# Altium PCB led_7seg_big.PcbDoc (part 2 of 2)
Units mm, origin at the board's own origin, x right, y up, seen from the top; angles counter-clockwise.
Board outline 221 x 297 mm, 2 copper layers (Top Layer, Bottom Layer); 205 components, 177 nets, 962 pads, 294 vias.
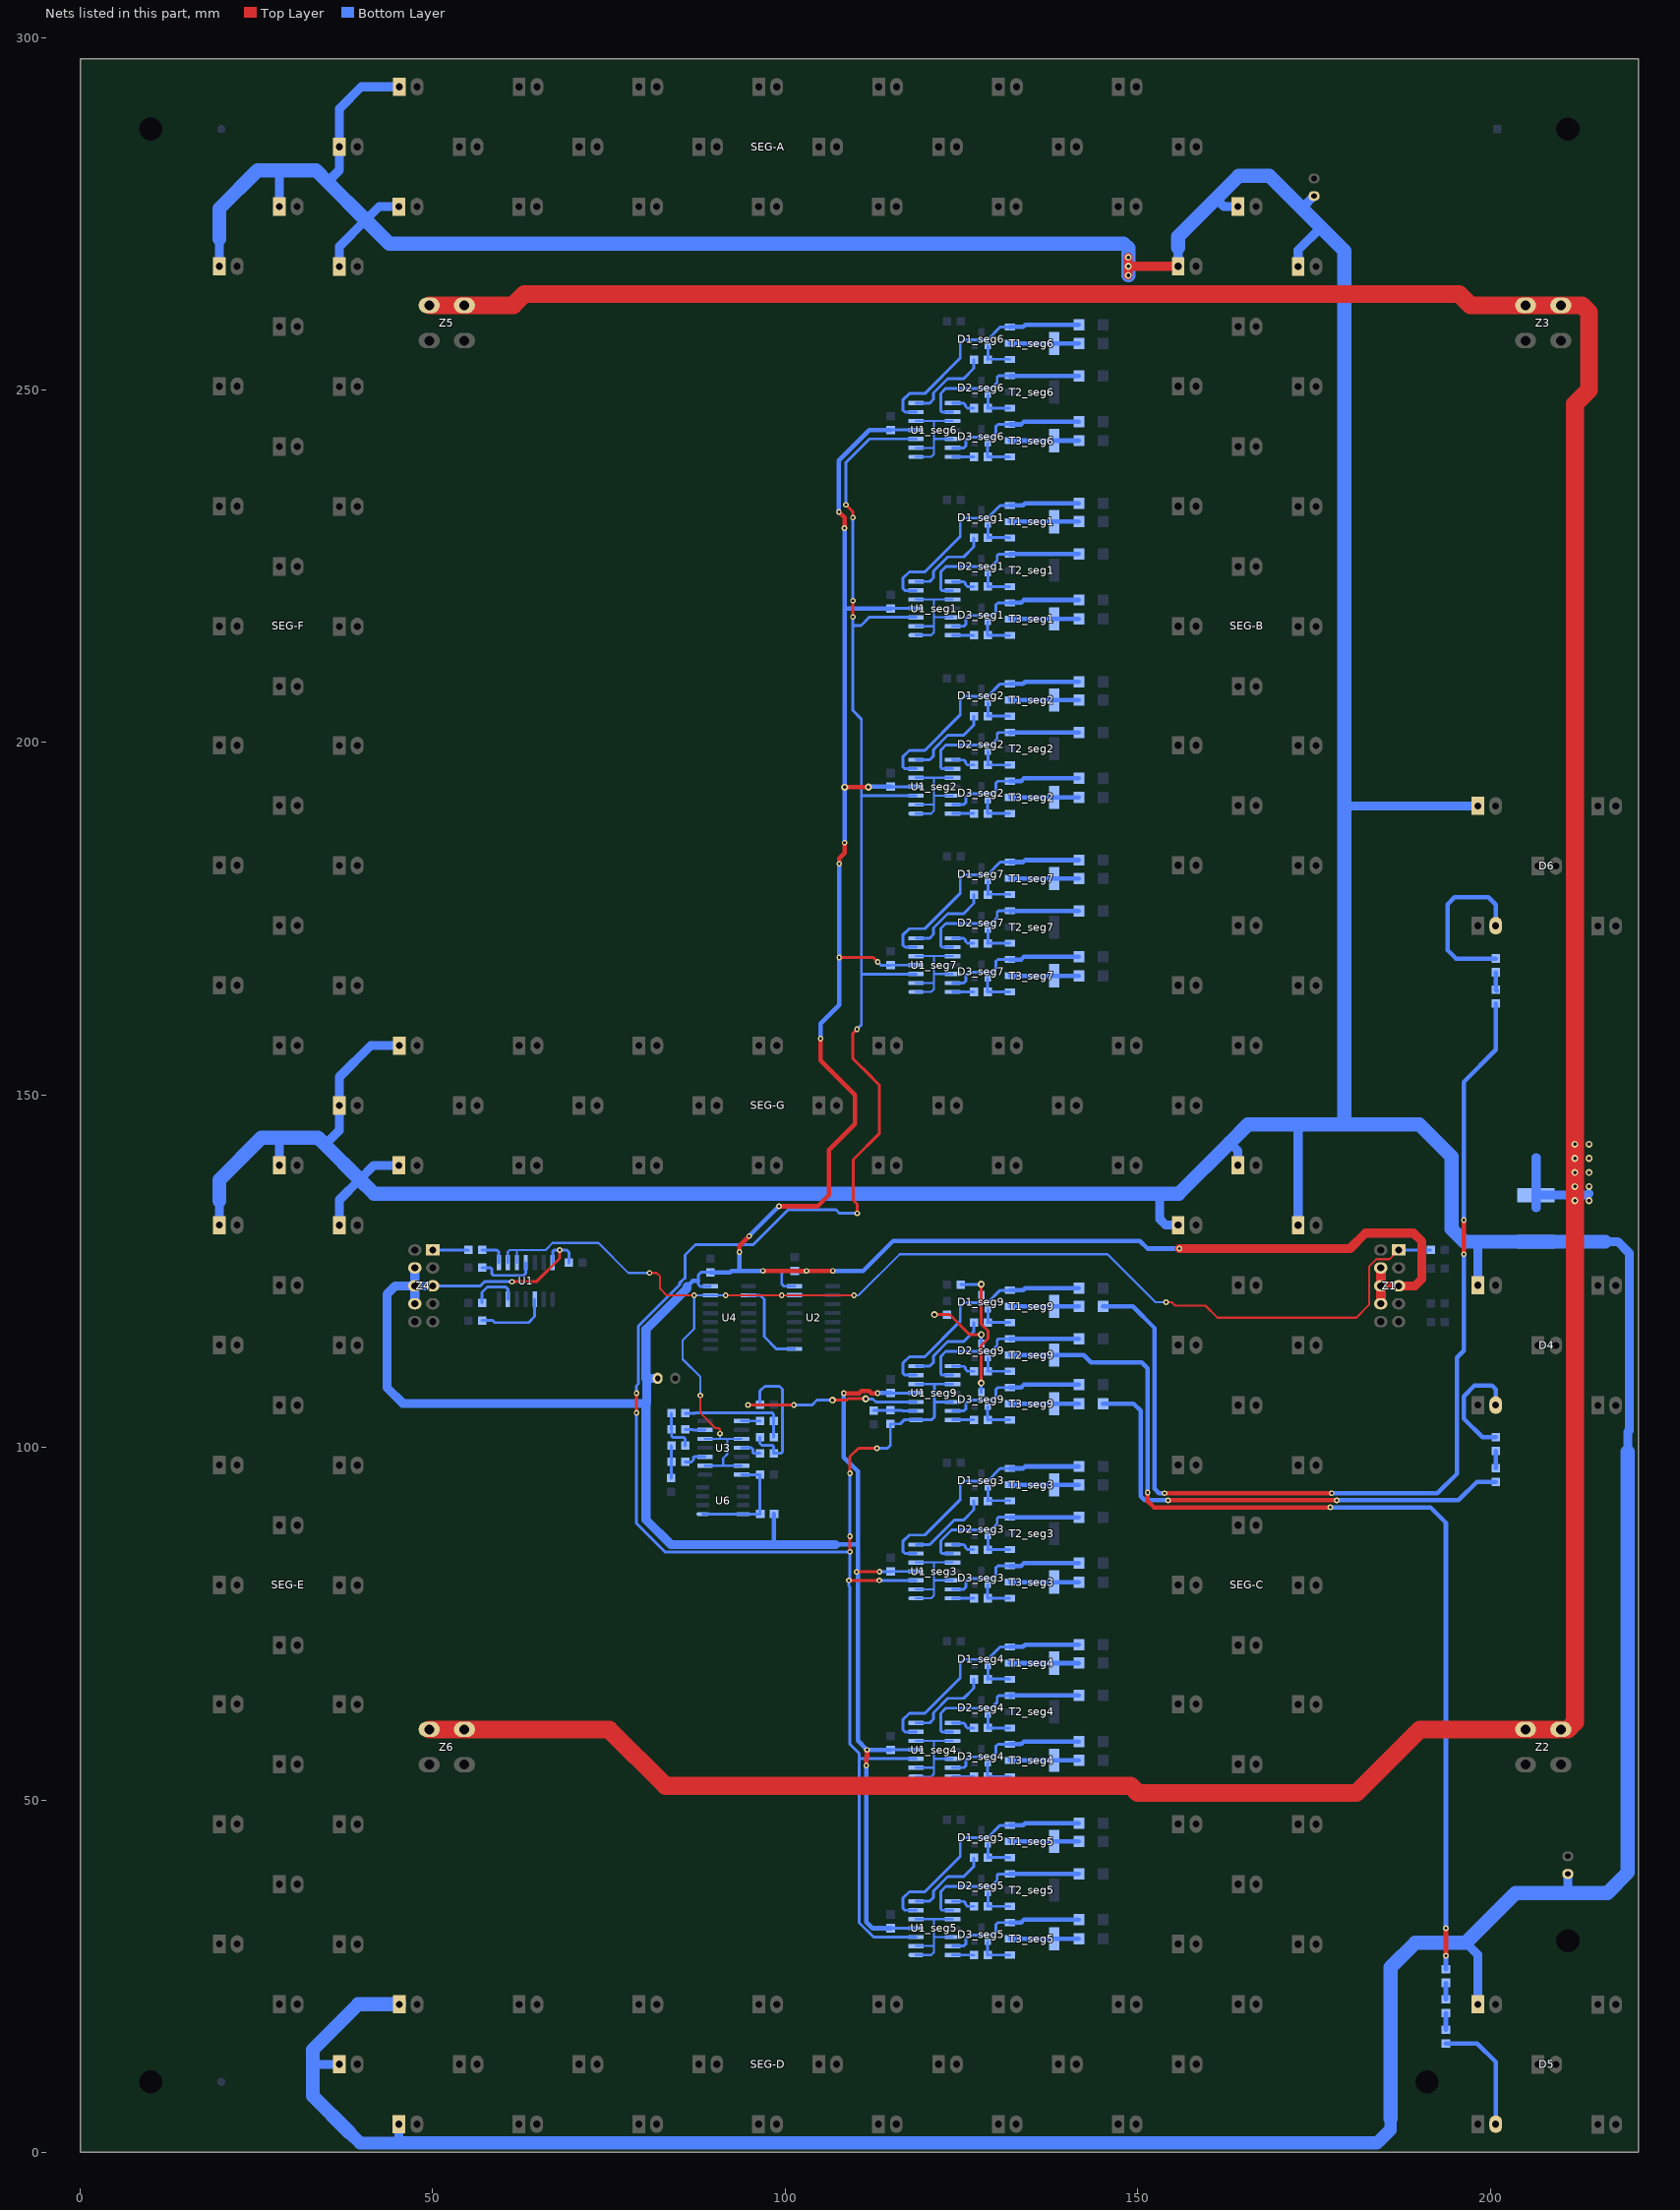
[diagram p2: the nets of this part, all layers, seen from the top]

## Via types
v1: diameter 1, hole 0.5, Top Layer to Bottom Layer, 198 vias
v2: diameter 0.8, hole 0.4, Top Layer to Bottom Layer, 96 vias

## Nets (pads, with @x,y where several pads share a name; then routed paths per layer and width w, separated by ;. In a path a pad name is that pad's centre, name@x,y a point inside that pad or via, vN(x,y) a via of type N, cw(c..) or ccw(c..) an arc to the next point about the centre after c; other vN are vias at no path point) (continued)
MODE: R30.2 U1.9 U1.10 U2.15 U3.2 U3.5 U3.10 U3.13 U4.15 Z1.1 | length 191.9
  Top Layer w0.305: v2(80.75,124.75) 81.75,124.75 82.25,124.25 82.25,122.5 83.166,121.584 v2(87.084,121.584) ; v2(87.968,107.366) 87.968,104.87 90.094,102.743 90.533,102.743 90.736,102.54 v2(90.736,101.956) ; v2(91.549,121.59) v2(99.499,121.59) v2(109.75,121.59) ; v2(154,120.6) 154.8,120.6 155.3,120.1 159.6,120.1 161.3,118.4 181,118.4 182.8,120.2 182.8,125.656 183.844,126.7 185.7,126.7 Z1.1@187,128
  Bottom Layer w0.305: U1.9@60.65,126.2 60.65,127.75 60.9,128 66,128 67,129 73.5,129 77.75,124.75 v2(80.75,124.75) ; U1.10@61.92,126.2 61.92,127.98 ; v2(87.968,107.366) 87.968,109.982 85.453,112.497 85.453,115.203 87.084,116.834 v2(87.084,121.584) U4.15@89.371,121.584 91.543,121.584 v2(91.549,121.59) ; U3.2@88.611,97.402 91.193,97.402 ; U3.5@88.611,101.212 90.736,101.212 ; v2(90.736,101.956) 90.736,101.212 ; U3.13@93.811,97.402 91.193,97.402 ; U3.10@93.811,101.212 91.778,101.212 ; v2(99.499,121.59) U2.15@101.31,121.59 ; v2(109.75,121.59) 110.41,121.59 116.22,127.4 145.7,127.4 152.5,120.6 v2(154,120.6) ; 90.736,101.212 91.778,101.212 ; 91.193,97.402 91.193,98.45 91.778,99.035 91.778,101.212
  Bottom Layer w0.406: Z1.1@187,128 R30.2@191.55,128
MODEQ: R1.2 Z4.1 | length 5
  Bottom Layer w0.406: Z4.1@50,128 R1.2@55.05,128
NetD1_seg1_1: D1_seg1.1 R6_seg1.2 T1_seg1.1 | length 5
  Bottom Layer w0.406: R6_seg1.2@128.697,229.009 R6_seg1.2@128.747,229.059 ; D1_seg1.1@128.747,230.909 R6_seg1.2@128.747,229.059 ; T1_seg1.1@131.847,229.009 131.797,229.059 R6_seg1.2@128.747,229.059
NetD1_seg2_1: D1_seg2.1 R6_seg2.2 T1_seg2.1 | length 5
  Bottom Layer w0.406: R6_seg2.2@128.697,203.709 R6_seg2.2@128.747,203.759 ; D1_seg2.1@128.747,205.609 R6_seg2.2@128.747,203.759 ; T1_seg2.1@131.847,203.709 131.797,203.759 R6_seg2.2@128.747,203.759
NetD1_seg3_1: D1_seg3.1 R6_seg3.2 T1_seg3.1 | length 5
  Bottom Layer w0.406: R6_seg3.2@128.697,92.4 R6_seg3.2@128.747,92.45 ; D1_seg3.1@128.747,94.3 R6_seg3.2@128.747,92.45 ; T1_seg3.1@131.847,92.4 131.797,92.45 R6_seg3.2@128.747,92.45
NetD1_seg4_1: D1_seg4.1 R6_seg4.2 T1_seg4.1 | length 5
  Bottom Layer w0.406: R6_seg4.2@128.697,67.1 R6_seg4.2@128.747,67.15 ; D1_seg4.1@128.747,69 R6_seg4.2@128.747,67.15 ; T1_seg4.1@131.847,67.1 131.797,67.15 R6_seg4.2@128.747,67.15
NetD1_seg5_1: D1_seg5.1 R6_seg5.2 T1_seg5.1 | length 5
  Bottom Layer w0.406: R6_seg5.2@128.697,41.8 R6_seg5.2@128.747,41.85 ; D1_seg5.1@128.747,43.7 R6_seg5.2@128.747,41.85 ; T1_seg5.1@131.847,41.8 131.797,41.85 R6_seg5.2@128.747,41.85
NetD1_seg6_1: D1_seg6.1 R6_seg6.2 T1_seg6.1 | length 5
  Bottom Layer w0.406: R6_seg6.2@128.697,254.309 R6_seg6.2@128.747,254.359 ; D1_seg6.1@128.747,256.209 R6_seg6.2@128.747,254.359 ; T1_seg6.1@131.847,254.309 131.797,254.359 R6_seg6.2@128.747,254.359
NetD1_seg7_1: D1_seg7.1 R6_seg7.2 T1_seg7.1 | length 5
  Bottom Layer w0.406: R6_seg7.2@128.697,178.409 R6_seg7.2@128.747,178.459 ; D1_seg7.1@128.747,180.309 R6_seg7.2@128.747,178.459 ; T1_seg7.1@131.847,178.409 131.797,178.459 R6_seg7.2@128.747,178.459
NetD1_seg9_1: D1_seg9.1 R6_seg9.2 T1_seg9.1 | length 5
  Bottom Layer w0.406: R6_seg9.2@128.697,117.7 R6_seg9.2@128.747,117.75 ; D1_seg9.1@128.747,119.6 R6_seg9.2@128.747,117.75 ; T1_seg9.1@131.847,117.7 131.797,117.75 R6_seg9.2@128.747,117.75
NetD1_seg9_3: D1_seg9.3 D3_seg9.3 R9_seg9.2 | length 20.6
  Top Layer w0.406: v1@127.744,109.191 v1(127.797,109.137) 127.797,114.466 128.755,115.423 128.755,116.549 127.797,117.506 v1(127.797,123.133)
  Bottom Layer w0.406: R9_seg9.2@124.93,123.133 v1(127.797,123.133) D1_seg9.3@127.797,121.6 ; D3_seg9.3@127.797,107.8 v1(127.797,109.137)
NetD2_seg1_1: D2_seg1.1 R7_seg1.2 T2_seg1.1 | length 5.1
  Bottom Layer w0.406: D2_seg1.1@128.747,224.009 128.747,222.159 R7_seg1.2@128.697,222.109 T2_seg1.1@131.847,222.109
NetD2_seg2_1: D2_seg2.1 R7_seg2.2 T2_seg2.1 | length 5.1
  Bottom Layer w0.406: D2_seg2.1@128.747,198.709 128.747,196.859 R7_seg2.2@128.697,196.809 T2_seg2.1@131.847,196.809
NetD2_seg3_1: D2_seg3.1 R7_seg3.2 T2_seg3.1 | length 5.1
  Bottom Layer w0.406: D2_seg3.1@128.747,87.4 128.747,85.55 R7_seg3.2@128.697,85.5 T2_seg3.1@131.847,85.5
NetD2_seg4_1: D2_seg4.1 R7_seg4.2 T2_seg4.1 | length 5.1
  Bottom Layer w0.406: D2_seg4.1@128.747,62.1 128.747,60.25 R7_seg4.2@128.697,60.2 T2_seg4.1@131.847,60.2
NetD2_seg5_1: D2_seg5.1 R7_seg5.2 T2_seg5.1 | length 5.1
  Bottom Layer w0.406: D2_seg5.1@128.747,36.8 128.747,34.95 R7_seg5.2@128.697,34.9 T2_seg5.1@131.847,34.9
NetD2_seg6_1: D2_seg6.1 R7_seg6.2 T2_seg6.1 | length 5.1
  Bottom Layer w0.406: D2_seg6.1@128.747,249.309 128.747,247.459 R7_seg6.2@128.697,247.409 T2_seg6.1@131.847,247.409
NetD2_seg7_1: D2_seg7.1 R7_seg7.2 T2_seg7.1 | length 5.1
  Bottom Layer w0.406: D2_seg7.1@128.747,173.409 128.747,171.559 R7_seg7.2@128.697,171.509 T2_seg7.1@131.847,171.509
NetD2_seg9_1: D2_seg9.1 R7_seg9.2 T2_seg9.1 | length 5.1
  Bottom Layer w0.406: D2_seg9.1@128.747,112.7 128.747,110.85 R7_seg9.2@128.697,110.8 T2_seg9.1@131.847,110.8
NetD2_seg9_3: D2_seg9.3 R15.2 | length 11.2
  Top Layer w0.406: v1(121.159,118.836) 123.303,118.836 126.144,115.995 v1(127.797,115.995)
  Bottom Layer w0.406: v1(121.159,118.836) R15.2@122.917,118.836 ; D2_seg9.3@127.797,115.038 D2_seg9.3@127.797,114.7 v1(127.797,115.995)
NetD3_seg1_1: D3_seg1.1 R8_seg1.2 T3_seg1.1 | length 5.1
  Bottom Layer w0.406: D3_seg1.1@128.747,217.109 128.697,217.059 R8_seg1.2@128.697,215.209 T3_seg1.1@131.847,215.209
NetD3_seg2_1: D3_seg2.1 R8_seg2.2 T3_seg2.1 | length 5.1
  Bottom Layer w0.406: D3_seg2.1@128.747,191.809 128.697,191.759 R8_seg2.2@128.697,189.909 T3_seg2.1@131.847,189.909
NetD3_seg3_1: D3_seg3.1 R8_seg3.2 T3_seg3.1 | length 5.1
  Bottom Layer w0.406: D3_seg3.1@128.747,80.5 128.697,80.45 R8_seg3.2@128.697,78.6 T3_seg3.1@131.847,78.6
NetD3_seg4_1: D3_seg4.1 R8_seg4.2 T3_seg4.1 | length 5.1
  Bottom Layer w0.406: D3_seg4.1@128.747,55.2 128.697,55.15 R8_seg4.2@128.697,53.3 T3_seg4.1@131.847,53.3
NetD3_seg5_1: D3_seg5.1 R8_seg5.2 T3_seg5.1 | length 5.1
  Bottom Layer w0.406: D3_seg5.1@128.747,29.9 128.697,29.85 R8_seg5.2@128.697,28 T3_seg5.1@131.847,28
NetD3_seg6_1: D3_seg6.1 R8_seg6.2 T3_seg6.1 | length 5.1
  Bottom Layer w0.406: D3_seg6.1@128.747,242.409 128.697,242.359 R8_seg6.2@128.697,240.509 T3_seg6.1@131.847,240.509
NetD3_seg7_1: D3_seg7.1 R8_seg7.2 T3_seg7.1 | length 5.1
  Bottom Layer w0.406: D3_seg7.1@128.747,166.509 128.697,166.459 R8_seg7.2@128.697,164.609 T3_seg7.1@131.847,164.609
NetD3_seg9_1: D3_seg9.1 R8_seg9.2 T3_seg9.1 | length 5.1
  Bottom Layer w0.406: D3_seg9.1@128.747,105.8 128.697,105.75 R8_seg9.2@128.697,103.9 T3_seg9.1@131.847,103.9
NetD4_K1: D4.K1 R11.2 | length 16.4
  Bottom Layer w0.635: D4.K1@200.77,106 200.77,108.23 200.25,108.75 197.75,108.75 196.25,107.25 196.25,104.075 198.875,101.45 R11.2@200.8,101.45
NetD5_K1: D5.K1 R14.2 | length 17
  Bottom Layer w0.635: R14.2@193.7,15.45 198.146,15.45 200.77,12.826 D5.K1@200.77,4
NetD6_K1: D6.K1 R17.2 | length 24.5
  Bottom Layer w0.635: D6.K1@200.77,174 200.77,177.012 199.753,178.029 194.927,178.029 193.936,177.038 193.936,170.536 195.122,169.35 R17.2@200.8,169.35
NetR1_1: R1.1 U1.8 | length 4
  Bottom Layer w0.406: R1.1@57,128 59.1,128 59.38,127.72 U1.8@59.38,126.2
NetR1_seg1_1: R1_seg1.1 T1_seg1.2 | length 9.8
  Bottom Layer w0.635: T1_seg1.2@131.847,231.309 T1_seg1.2@138.147,231.309 R1_seg1.1@141.647,231.309
NetR1_seg2_1: R1_seg2.1 T1_seg2.2 | length 9.8
  Bottom Layer w0.635: T1_seg2.2@131.847,206.009 T1_seg2.2@138.147,206.009 R1_seg2.1@141.647,206.009
NetR1_seg3_1: R1_seg3.1 T1_seg3.2 | length 9.8
  Bottom Layer w0.635: T1_seg3.2@131.847,94.7 T1_seg3.2@138.147,94.7 R1_seg3.1@141.647,94.7
NetR1_seg4_1: R1_seg4.1 T1_seg4.2 | length 9.8
  Bottom Layer w0.635: T1_seg4.2@131.847,69.4 T1_seg4.2@138.147,69.4 R1_seg4.1@141.647,69.4
NetR1_seg5_1: R1_seg5.1 T1_seg5.2 | length 9.8
  Bottom Layer w0.635: T1_seg5.2@131.847,44.1 T1_seg5.2@138.147,44.1 R1_seg5.1@141.647,44.1
NetR1_seg6_1: R1_seg6.1 T1_seg6.2 | length 9.8
  Bottom Layer w0.635: T1_seg6.2@131.847,256.609 T1_seg6.2@138.147,256.609 R1_seg6.1@141.647,256.609
NetR1_seg7_1: R1_seg7.1 T1_seg7.2 | length 9.8
  Bottom Layer w0.635: T1_seg7.2@131.847,180.709 T1_seg7.2@138.147,180.709 R1_seg7.1@141.647,180.709
NetR1_seg9_1: R1_seg9.1 T1_seg9.2 | length 9.8
  Bottom Layer w0.635: T1_seg9.2@131.847,120 T1_seg9.2@138.147,120 R1_seg9.1@141.647,120
NetR1_seg9_2: R1_seg9.2 R16.1 | length 144.7
  Top Layer w0.635: v2(153.8,93.5) v2(177.5,93.5) ; v2(196.25,127.4) 196.25,128.4 v2(196.25,132.25)
  Bottom Layer w0.635: R1_seg9.2@145.077,120 149.3,120 152.4,116.9 152.4,94.1 153,93.5 v2(153.8,93.5) ; v2(177.5,93.5) 192.5,93.5 195.25,96.25 195.25,112.75 196.25,113.75 v2(196.25,127.4) ; v2(196.25,132.25) 196.25,151.843 200.8,156.393 R16.1@200.8,163
NetR2_1: R2.1 U1.11 | length 8.7
  Bottom Layer w0.406: R2.1@57,125.5 58.2,125.5 58.4,125.3 58.4,124.6 58.6,124.4 62.9,124.4 63.19,124.69 U1.11@63.19,126.2
NetR2_seg1_1: R2_seg1.1 T3_seg1.2 | length 9.8
  Bottom Layer w0.635: T3_seg1.2@131.847,217.509 R2_seg1.1@141.647,217.509
NetR2_seg2_1: R2_seg2.1 T3_seg2.2 | length 9.8
  Bottom Layer w0.635: T3_seg2.2@131.847,192.209 R2_seg2.1@141.647,192.209
NetR2_seg3_1: R2_seg3.1 T3_seg3.2 | length 9.8
  Bottom Layer w0.635: T3_seg3.2@131.847,80.9 R2_seg3.1@141.647,80.9
NetR2_seg4_1: R2_seg4.1 T3_seg4.2 | length 9.8
  Bottom Layer w0.635: T3_seg4.2@131.847,55.6 R2_seg4.1@141.647,55.6
NetR2_seg5_1: R2_seg5.1 T3_seg5.2 | length 9.8
  Bottom Layer w0.635: T3_seg5.2@131.847,30.3 R2_seg5.1@141.647,30.3
NetR2_seg6_1: R2_seg6.1 T3_seg6.2 | length 9.8
  Bottom Layer w0.635: T3_seg6.2@131.847,242.809 R2_seg6.1@141.647,242.809
NetR2_seg7_1: R2_seg7.1 T3_seg7.2 | length 9.8
  Bottom Layer w0.635: T3_seg7.2@131.847,166.909 R2_seg7.1@141.647,166.909
NetR2_seg9_1: R2_seg9.1 T3_seg9.2 | length 9.8
  Bottom Layer w0.635: T3_seg9.2@131.847,106.2 R2_seg9.1@141.647,106.2
NetR2_seg9_2: R2_seg9.2 R10.1 | length 69.6
  Top Layer w0.635: v2(154.3,92.5) v2(178.2,92.5)
  Bottom Layer w0.635: R2_seg9.2@145.077,106.2 149.4,106.2 150.4,105.2 150.4,93.1 151,92.5 v2(154.3,92.5) ; v2(178.2,92.5) 195.5,92.5 198.1,95.1 R10.1@200.8,95.1
NetR3_1: R3.1 U1.6 | length 7.1
  Bottom Layer w0.406: R3.1@57,120.5 57,122 57.75,122.75 60.35,122.75 60.65,122.45 U1.6@60.65,121 U1.6@60.6,121.05
NetR3_seg1_1: R3_seg1.1 T1_seg1.3 U1_seg1.6 | length 34
  Bottom Layer w0.406: U1_seg1.6@118.547,221.559 116.982,221.559 116.67,221.871 116.67,223.268 117.584,224.183 119.794,224.183 124.823,229.212 124.823,231.32 125.331,231.828 128.697,231.828 130.478,233.609 T1_seg1.3@131.847,233.609
  Bottom Layer w0.635: T1_seg1.3@131.847,233.609 131.87,233.631 133.738,233.631 134.016,233.909 R3_seg1.1@141.647,233.909
NetR3_seg2_1: R3_seg2.1 T1_seg2.3 U1_seg2.6 | length 34
  Bottom Layer w0.406: U1_seg2.6@118.547,196.259 116.982,196.259 116.67,196.571 116.67,197.968 117.584,198.883 119.794,198.883 124.823,203.912 124.823,206.02 125.331,206.528 128.697,206.528 130.478,208.309 T1_seg2.3@131.847,208.309
  Bottom Layer w0.635: T1_seg2.3@131.847,208.309 131.87,208.331 133.738,208.331 134.016,208.609 R3_seg2.1@141.647,208.609
NetR3_seg3_1: R3_seg3.1 T1_seg3.3 U1_seg3.6 | length 34
  Bottom Layer w0.406: U1_seg3.6@118.547,84.95 116.982,84.95 116.67,85.262 116.67,86.659 117.584,87.574 119.794,87.574 124.823,92.603 124.823,94.711 125.331,95.219 128.697,95.219 130.478,97 T1_seg3.3@131.847,97
  Bottom Layer w0.635: T1_seg3.3@131.847,97 131.87,97.022 133.738,97.022 134.016,97.3 R3_seg3.1@141.647,97.3
NetR3_seg4_1: R3_seg4.1 T1_seg4.3 U1_seg4.6 | length 34
  Bottom Layer w0.406: U1_seg4.6@118.547,59.65 116.982,59.65 116.67,59.962 116.67,61.359 117.584,62.274 119.794,62.274 124.823,67.303 124.823,69.411 125.331,69.919 128.697,69.919 130.478,71.7 T1_seg4.3@131.847,71.7
  Bottom Layer w0.635: T1_seg4.3@131.847,71.7 131.87,71.722 133.738,71.722 134.016,72 R3_seg4.1@141.647,72
NetR3_seg5_1: R3_seg5.1 T1_seg5.3 U1_seg5.6 | length 34
  Bottom Layer w0.406: U1_seg5.6@118.547,34.35 116.982,34.35 116.67,34.662 116.67,36.059 117.584,36.974 119.794,36.974 124.823,42.003 124.823,44.111 125.331,44.619 128.697,44.619 130.478,46.4 T1_seg5.3@131.847,46.4
  Bottom Layer w0.635: T1_seg5.3@131.847,46.4 131.87,46.422 133.738,46.422 134.016,46.7 R3_seg5.1@141.647,46.7
NetR3_seg6_1: R3_seg6.1 T1_seg6.3 U1_seg6.6 | length 34
  Bottom Layer w0.406: U1_seg6.6@118.547,246.859 116.982,246.859 116.67,247.171 116.67,248.568 117.584,249.483 119.794,249.483 124.823,254.512 124.823,256.62 125.331,257.128 128.697,257.128 130.478,258.909 T1_seg6.3@131.847,258.909
  Bottom Layer w0.635: T1_seg6.3@131.847,258.909 131.87,258.931 133.738,258.931 134.016,259.209 R3_seg6.1@141.647,259.209
NetR3_seg7_1: R3_seg7.1 T1_seg7.3 U1_seg7.6 | length 34
  Bottom Layer w0.406: U1_seg7.6@118.547,170.959 116.982,170.959 116.67,171.271 116.67,172.668 117.584,173.583 119.794,173.583 124.823,178.612 124.823,180.72 125.331,181.228 128.697,181.228 130.478,183.009 T1_seg7.3@131.847,183.009
  Bottom Layer w0.635: T1_seg7.3@131.847,183.009 131.87,183.031 133.738,183.031 134.016,183.309 R3_seg7.1@141.647,183.309
NetR3_seg9_1: R3_seg9.1 T1_seg9.3 U1_seg9.6 | length 34
  Bottom Layer w0.406: U1_seg9.6@118.547,110.25 116.982,110.25 116.67,110.562 116.67,111.959 117.584,112.874 119.794,112.874 124.823,117.903 124.823,120.011 125.331,120.519 128.697,120.519 130.478,122.3 T1_seg9.3@131.847,122.3
  Bottom Layer w0.635: T1_seg9.3@131.847,122.3 131.87,122.322 133.738,122.322 134.016,122.6 R3_seg9.1@141.647,122.6
NetR4_1: R4.1 U1.3 | length 10.4
  Bottom Layer w0.406: R4.1@57,118 58.5,118 58.8,117.7 63.6,117.7 64.46,118.56 U1.3@64.46,121
NetR4_seg1_1: R4_seg1.1 T2_seg1.3 U1_seg1.9 | length 25.5
  Bottom Layer w0.406: U1_seg1.9@123.747,221.559 122.197,221.559 122.047,221.709 122.047,224.209 122.763,224.925 129.215,224.925 130.047,225.757 130.047,226.509 130.247,226.709 T2_seg1.3@131.847,226.709
  Bottom Layer w0.635: T2_seg1.3@131.935,226.621 T2_seg1.3@131.847,226.709 R4_seg1.1@141.647,226.709
NetR4_seg2_1: R4_seg2.1 T2_seg2.3 U1_seg2.9 | length 25.5
  Bottom Layer w0.406: U1_seg2.9@123.747,196.259 122.197,196.259 122.047,196.409 122.047,198.909 122.763,199.625 129.215,199.625 130.047,200.457 130.047,201.209 130.247,201.409 T2_seg2.3@131.847,201.409
  Bottom Layer w0.635: T2_seg2.3@131.935,201.321 T2_seg2.3@131.847,201.409 R4_seg2.1@141.647,201.409
NetR4_seg3_1: R4_seg3.1 T2_seg3.3 U1_seg3.9 | length 25
  Bottom Layer w0.406: U1_seg3.9@123.747,84.95 122.197,84.95 122.047,85.1 122.047,86.747 123.616,88.316 129.215,88.316 130.047,89.148 130.047,89.9 130.247,90.1 T2_seg3.3@131.847,90.1
  Bottom Layer w0.635: T2_seg3.3@131.935,90.012 T2_seg3.3@131.847,90.1 R4_seg3.1@141.647,90.1
NetR4_seg4_1: R4_seg4.1 T2_seg4.3 U1_seg4.9 | length 25.5
  Bottom Layer w0.406: U1_seg4.9@123.747,59.65 122.197,59.65 122.047,59.8 122.047,62.3 122.763,63.016 129.215,63.016 130.047,63.848 130.047,64.6 130.247,64.8 T2_seg4.3@131.847,64.8
  Bottom Layer w0.635: T2_seg4.3@131.935,64.712 T2_seg4.3@131.847,64.8 R4_seg4.1@141.647,64.8
NetR4_seg5_1: R4_seg5.1 T2_seg5.3 U1_seg5.9 | length 25.5
  Bottom Layer w0.406: U1_seg5.9@123.747,34.35 122.197,34.35 122.047,34.5 122.047,37 122.763,37.716 129.215,37.716 130.047,38.548 130.047,39.3 130.247,39.5 T2_seg5.3@131.847,39.5
  Bottom Layer w0.635: T2_seg5.3@131.935,39.412 T2_seg5.3@131.847,39.5 R4_seg5.1@141.647,39.5
NetR4_seg6_1: R4_seg6.1 T2_seg6.3 U1_seg6.9 | length 25.5
  Bottom Layer w0.406: U1_seg6.9@123.747,246.859 122.197,246.859 122.047,247.009 122.047,249.509 122.763,250.225 129.215,250.225 130.047,251.057 130.047,251.809 130.247,252.009 T2_seg6.3@131.847,252.009
  Bottom Layer w0.635: T2_seg6.3@131.935,251.921 T2_seg6.3@131.847,252.009 R4_seg6.1@141.647,252.009
NetR4_seg7_1: R4_seg7.1 T2_seg7.3 U1_seg7.9 | length 25.5
  Bottom Layer w0.406: U1_seg7.9@123.747,170.959 122.197,170.959 122.047,171.109 122.047,173.609 122.763,174.325 129.215,174.325 130.047,175.157 130.047,175.909 130.247,176.109 T2_seg7.3@131.847,176.109
  Bottom Layer w0.635: T2_seg7.3@131.935,176.021 T2_seg7.3@131.847,176.109 R4_seg7.1@141.647,176.109
NetR4_seg9_1: R4_seg9.1 T2_seg9.3 U1_seg9.9 | length 25.5
  Bottom Layer w0.406: U1_seg9.9@123.747,110.25 122.197,110.25 122.047,110.4 122.047,112.9 122.763,113.616 129.215,113.616 130.047,114.448 130.047,115.2 130.247,115.4 T2_seg9.3@131.847,115.4
  Bottom Layer w0.635: T2_seg9.3@131.935,115.312 T2_seg9.3@131.847,115.4 R4_seg9.1@141.647,115.4
NetR5_seg1_1: R5_seg1.1 T3_seg1.3 U1_seg1.13 | length 20.5
  Bottom Layer w0.406: U1_seg1.13@123.747,216.479 125.317,216.479 125.647,216.809 125.647,217.609 126.055,218.016 129.355,218.016 129.847,218.509 129.847,219.509 130.147,219.809 T3_seg1.3@131.847,219.809
  Bottom Layer w0.635: T3_seg1.3@131.847,219.809 133.454,219.809 133.854,220.209 R5_seg1.1@141.647,220.209
NetR5_seg2_1: R5_seg2.1 T3_seg2.3 U1_seg2.13 | length 20.5
  Bottom Layer w0.406: U1_seg2.13@123.747,191.179 125.317,191.179 125.647,191.509 125.647,192.309 126.055,192.716 129.355,192.716 129.847,193.209 129.847,194.209 130.147,194.509 T3_seg2.3@131.847,194.509
  Bottom Layer w0.635: T3_seg2.3@131.847,194.509 133.454,194.509 133.854,194.909 R5_seg2.1@141.647,194.909
NetR5_seg3_1: R5_seg3.1 T3_seg3.3 U1_seg3.13 | length 20.5
  Bottom Layer w0.406: U1_seg3.13@123.747,79.87 125.317,79.87 125.647,80.2 125.647,81 126.055,81.407 129.355,81.407 129.847,81.9 129.847,82.9 130.147,83.2 T3_seg3.3@131.847,83.2
  Bottom Layer w0.635: T3_seg3.3@131.847,83.2 133.454,83.2 133.854,83.6 R5_seg3.1@141.647,83.6
NetR5_seg4_1: R5_seg4.1 T3_seg4.3 U1_seg4.13 | length 20.5
  Bottom Layer w0.406: U1_seg4.13@123.747,54.57 125.317,54.57 125.647,54.9 125.647,55.7 126.055,56.107 129.355,56.107 129.847,56.6 129.847,57.6 130.147,57.9 T3_seg4.3@131.847,57.9
  Bottom Layer w0.635: T3_seg4.3@131.847,57.9 133.454,57.9 133.854,58.3 R5_seg4.1@141.647,58.3
NetR5_seg5_1: R5_seg5.1 T3_seg5.3 U1_seg5.13 | length 20.5
  Bottom Layer w0.406: U1_seg5.13@123.747,29.27 125.317,29.27 125.647,29.6 125.647,30.4 126.055,30.807 129.355,30.807 129.847,31.3 129.847,32.3 130.147,32.6 T3_seg5.3@131.847,32.6
  Bottom Layer w0.635: T3_seg5.3@131.847,32.6 133.454,32.6 133.854,33 R5_seg5.1@141.647,33
NetR5_seg6_1: R5_seg6.1 T3_seg6.3 U1_seg6.13 | length 20.5
  Bottom Layer w0.406: U1_seg6.13@123.747,241.779 125.317,241.779 125.647,242.109 125.647,242.909 126.055,243.316 129.355,243.316 129.847,243.809 129.847,244.809 130.147,245.109 T3_seg6.3@131.847,245.109
  Bottom Layer w0.635: T3_seg6.3@131.847,245.109 133.454,245.109 133.854,245.509 R5_seg6.1@141.647,245.509
NetR5_seg7_1: R5_seg7.1 T3_seg7.3 U1_seg7.13 | length 20.5
  Bottom Layer w0.406: U1_seg7.13@123.747,165.879 125.317,165.879 125.647,166.209 125.647,167.009 126.055,167.416 129.355,167.416 129.847,167.909 129.847,168.909 130.147,169.209 T3_seg7.3@131.847,169.209
  Bottom Layer w0.635: T3_seg7.3@131.847,169.209 133.454,169.209 133.854,169.609 R5_seg7.1@141.647,169.609
NetR5_seg9_1: R5_seg9.1 T3_seg9.3 U1_seg9.13 | length 20.5
  Bottom Layer w0.406: U1_seg9.13@123.747,105.17 125.317,105.17 125.647,105.5 125.647,106.3 126.055,106.707 129.355,106.707 129.847,107.2 129.847,108.2 130.147,108.5 T3_seg9.3@131.847,108.5
  Bottom Layer w0.635: T3_seg9.3@131.847,108.5 133.454,108.5 133.854,108.9 R5_seg9.1@141.647,108.9
NetR6_seg1_1: R6_seg1.1 U1_seg1.7 | length 12
  Bottom Layer w0.406: U1_seg1.7@118.547,222.829 120.48,222.829 121.007,223.357 121.007,224.278 123.045,226.316 125.306,226.316 126.747,227.758 R6_seg1.1@126.747,229.009
NetR6_seg2_1: R6_seg2.1 U1_seg2.7 | length 12
  Bottom Layer w0.406: U1_seg2.7@118.547,197.529 120.48,197.529 121.007,198.057 121.007,198.978 123.045,201.016 125.306,201.016 126.747,202.458 R6_seg2.1@126.747,203.709
NetR6_seg3_1: R6_seg3.1 U1_seg3.7 | length 11.5
  Bottom Layer w0.406: U1_seg3.7@118.547,86.22 120.48,86.22 123.967,89.707 125.306,89.707 126.747,91.149 R6_seg3.1@126.747,92.4
NetR6_seg4_1: R6_seg4.1 U1_seg4.7 | length 12
  Bottom Layer w0.406: U1_seg4.7@118.547,60.92 120.48,60.92 121.007,61.448 121.007,62.369 123.045,64.407 125.306,64.407 126.747,65.849 R6_seg4.1@126.747,67.1
NetR6_seg5_1: R6_seg5.1 U1_seg5.7 | length 12
  Bottom Layer w0.406: U1_seg5.7@118.547,35.62 120.48,35.62 121.007,36.148 121.007,37.069 123.045,39.107 125.306,39.107 126.747,40.549 R6_seg5.1@126.747,41.8
NetR6_seg6_1: R6_seg6.1 U1_seg6.7 | length 12
  Bottom Layer w0.406: U1_seg6.7@118.547,248.129 120.48,248.129 121.007,248.657 121.007,249.578 123.045,251.616 125.306,251.616 126.747,253.058 R6_seg6.1@126.747,254.309
NetR6_seg7_1: R6_seg7.1 U1_seg7.7 | length 12
  Bottom Layer w0.406: U1_seg7.7@118.547,172.229 120.48,172.229 121.007,172.757 121.007,173.678 123.045,175.716 125.306,175.716 126.747,177.158 R6_seg7.1@126.747,178.409
NetR6_seg9_1: R6_seg9.1 U1_seg9.7 | length 12
  Bottom Layer w0.406: U1_seg9.7@118.547,111.52 120.48,111.52 121.007,112.048 121.007,112.969 123.045,115.007 125.306,115.007 126.747,116.449 R6_seg9.1@126.747,117.7
NetR7_seg1_1: R7_seg1.1 U1_seg1.8 | length 3.4
  Bottom Layer w0.406: U1_seg1.8@123.747,222.829 123.767,222.809 125.347,222.809 125.547,222.609 125.547,222.409 125.847,222.109 R7_seg1.1@126.747,222.109
NetR7_seg2_1: R7_seg2.1 U1_seg2.8 | length 3.4
  Bottom Layer w0.406: U1_seg2.8@123.747,197.529 123.767,197.509 125.347,197.509 125.547,197.309 125.547,197.109 125.847,196.809 R7_seg2.1@126.747,196.809
NetR7_seg3_1: R7_seg3.1 U1_seg3.8 | length 3.4
  Bottom Layer w0.406: U1_seg3.8@123.747,86.22 123.767,86.2 125.347,86.2 125.547,86 125.547,85.8 125.847,85.5 R7_seg3.1@126.747,85.5
NetR7_seg4_1: R7_seg4.1 U1_seg4.8 | length 3.4
  Bottom Layer w0.406: U1_seg4.8@123.747,60.92 123.767,60.9 125.347,60.9 125.547,60.7 125.547,60.5 125.847,60.2 R7_seg4.1@126.747,60.2
NetR7_seg5_1: R7_seg5.1 U1_seg5.8 | length 3.4
  Bottom Layer w0.406: U1_seg5.8@123.747,35.62 123.767,35.6 125.347,35.6 125.547,35.4 125.547,35.2 125.847,34.9 R7_seg5.1@126.747,34.9
NetR7_seg6_1: R7_seg6.1 U1_seg6.8 | length 3.4
  Bottom Layer w0.406: U1_seg6.8@123.747,248.129 123.767,248.109 125.347,248.109 125.547,247.909 125.547,247.709 125.847,247.409 R7_seg6.1@126.747,247.409
NetR7_seg7_1: R7_seg7.1 U1_seg7.8 | length 3.4
  Bottom Layer w0.406: U1_seg7.8@123.747,172.229 123.767,172.209 125.347,172.209 125.547,172.009 125.547,171.809 125.847,171.509 R7_seg7.1@126.747,171.509
NetR7_seg9_1: R7_seg9.1 U1_seg9.8 | length 3.4
  Bottom Layer w0.406: U1_seg9.8@123.747,111.52 123.767,111.5 125.347,111.5 125.547,111.3 125.547,111.1 125.847,110.8 R7_seg9.1@126.747,110.8
NetR8_seg1_1: R8_seg1.1 U1_seg1.14 | length 3
  Bottom Layer w0.406: U1_seg1.14@123.747,215.209 R8_seg1.1@126.747,215.209
NetR8_seg2_1: R8_seg2.1 U1_seg2.14 | length 3
  Bottom Layer w0.406: U1_seg2.14@123.747,189.909 R8_seg2.1@126.747,189.909
NetR8_seg3_1: R8_seg3.1 U1_seg3.14 | length 3
  Bottom Layer w0.406: U1_seg3.14@123.747,78.6 R8_seg3.1@126.747,78.6
NetR8_seg4_1: R8_seg4.1 U1_seg4.14 | length 3
  Bottom Layer w0.406: U1_seg4.14@123.747,53.3 R8_seg4.1@126.747,53.3
NetR8_seg5_1: R8_seg5.1 U1_seg5.14 | length 3
  Bottom Layer w0.406: U1_seg5.14@123.747,28 R8_seg5.1@126.747,28
NetR8_seg6_1: R8_seg6.1 U1_seg6.14 | length 3
  Bottom Layer w0.406: U1_seg6.14@123.747,240.509 R8_seg6.1@126.747,240.509
NetR8_seg7_1: R8_seg7.1 U1_seg7.14 | length 3
  Bottom Layer w0.406: U1_seg7.14@123.747,164.609 R8_seg7.1@126.747,164.609
NetR8_seg9_1: R8_seg9.1 U1_seg9.14 | length 3
  Bottom Layer w0.406: U1_seg9.14@123.747,103.9 R8_seg9.1@126.747,103.9
NetR10_2: R10.2 R11.1 | length 2.4
  Bottom Layer w0.635: R10.2@200.8,97.05 R11.1@200.8,99.5
NetR12_1: R12.1 T2_seg9.2 | length 150
  Top Layer w0.635: v2(151.4,93.6) 151.4,92.4 152.3,91.5 v2(177.3,91.5) ; v2(193.7,27.9) v2(193.7,31.8) v2@193.733,31.767
  Bottom Layer w0.635: T2_seg9.2@131.847,113.1 T2_seg9.2@138.147,113.1 142.325,113.1 143.365,112.06 145.3,112.06 ; 147.9,112.06 145.3,112.06 ; v2(151.4,93.6) 151.4,111.2 150.54,112.06 145.3,112.06 ; v2(177.3,91.5) 191.5,91.5 193.7,89.3 193.7,81.6 ; v2(193.7,27.9) R12.1@193.7,26 R12.1@193.708,26.008 ; v2(193.7,31.8) 193.7,81.6 ; 193.7,82.9 193.7,81.6
NetR12_2: R12.2 R13.1 | length 2.3
  Bottom Layer w0.635: R13.1@193.7,21.7 R12.2@193.7,24.05
NetR13_2: R13.2 R14.1 | length 2.3
  Bottom Layer w0.635: R14.1@193.7,17.4 R13.2@193.7,19.75
NetR16_2: R16.2 R17.1 | length 2.7
  Bottom Layer w0.635: R17.1@200.8,167.4 R16.2@200.8,164.95 200.8,164.866 R16.2@200.896,164.77
NetR18_1: R18.1 U3.3 | length 3.3
  Bottom Layer w0.406: R18.1@85.809,97.945 86.696,97.945 86.948,98.196 86.948,98.527 87.094,98.672 U3.3@88.611,98.672
NetR18_2: R18.2 R19.1 R20.2 | length 4.6
  Bottom Layer w0.406: R19.1@83.809,95.645 83.859,95.695 R18.2@83.859,97.945 R20.2@83.859,100.245
NetR20_1: R20.1 R21.2 R22.2 | length 6.3
  Bottom Layer w0.406: R22.2@83.859,104.845 R21.2@83.859,102.545 83.874,102.53 83.874,101.595 84.047,101.422 85.652,101.422 85.809,101.265 R20.1@85.809,100.245
NetR21_1: R21.1 U3.6 | length 2.8
  Bottom Layer w0.406: R21.1@85.809,102.545 86.917,102.545 86.98,102.482 U3.6@88.611,102.482
NetR22_1: R22.1 R23.2 R24.2 | length 16.1
  Bottom Layer w0.406: R22.1@85.904,104.75 R22.1@85.809,104.845 87.145,104.845 87.227,104.927 98.124,104.927 98.359,104.692 R23.2@98.359,103.745 R24.2@98.359,101.445
NetR23_1: R23.1 U3.8 | length 2.6
  Bottom Layer w0.406: U3.8@93.811,103.752 96.402,103.752 R23.1@96.409,103.745
NetR25_1: R25.1 U3.11 | length 3.5
  Bottom Layer w0.406: U3.11@93.855,99.898 U3.11@93.811,99.942 95.21,99.942 95.406,99.746 95.406,99.289 95.55,99.145 R25.1@96.409,99.145 R25.1@96.272,99.282
NetU2_9: U2.9 U4.2 | length 12.8
  Bottom Layer w0.406: U4.2@94.771,121.584 96.432,121.584 97.01,121.006 97.01,115.697 98.727,113.98 U2.9@101.32,113.98
VCC: C1.2 C1_seg1.1 C1_seg2.1 C1_seg3.1 C1_seg4.1 C1_seg5.1 C1_seg6.1 C1_seg7.1 C1_seg9.1 C4.1 C5.1 C6.1 R28.1 U1.14 U1_seg1.4 U1_seg2.4 U1_seg3.4 U1_seg4.4 U1_seg5.4 U1_seg6.4 U1_seg7.4 U1_seg9.4 U2.16 U4.16 Z1.4 Z1.5 Z1.6 Z1.8 Z4.4 Z4.5 Z4.6 Z4.8 | length 588.1
  Top Layer w0.406: v2(61.25,123.5) 64.7,123.5 68,126.8 v2(68,128) ; v2(107.653,169.494) 112.479,169.494 v2(113.114,168.859) ; v2@110.116,82.366 v2(113.368,82.366)
  Top Layer w0.635: v2(93.5,127.7) 93.5,128.6 v2(94.883,129.983) ; v2(96.832,125.044) v2(103.03,125.044) v2(106.756,125.044) ; v2(99.1,134.2) 104.6,134.2 106.2,135.8 106.2,142.2 109.9,145.9 109.9,150 105,154.9 v2(105,158) ; v2(107.6,232.7) 108.4,231.9 v2(108.4,230.4) ; v2(107.657,182.783) 107.657,183.543 108.415,184.3 v2(108.415,185.776) ; v2(108.3,107.686) 110.486,107.686 110.8,108 111.9,108 112.214,107.686 v2(113.1,107.686) ; v1@108.44,193.675 v1(111.793,193.675) ; v2(111.5,54.886) 111.5,55.986 111.6,56.086 v2(111.6,57.1)
  Top Layer w1.27: v2(155.9,128.2) 180.1,128.2 182.3,130.4 189.1,130.4 190.3,129.2 190.3,123.9 189.32,122.92 Z1.5@187,122.92 Z1.6@184.46,122.92 ; Z1.8@184.46,120.38 Z1.6@184.46,122.92 ; Z1.4@184.46,125.46 Z1.6@184.46,122.92
  Bottom Layer w0.406: Z4.5@50,122.92 56.75,122.92 57.33,123.5 v2(61.25,123.5) ; U1.14@67,126.2 67,127.8 67.2,128 v2(68,128) 69,128 69.3,127.7 C4.1@69.3,126.2 ; U4.16@89.339,122.885 U4.16@89.371,122.854 87.898,122.854 87.663,123.088 87.663,123.647 87.663,124.46 88.029,124.826 C6.1@89.401,124.826 ; U2.16@101.32,122.87 99.794,122.87 99.499,123.165 99.499,124.663 99.879,125.043 C5.1@101.351,125.043 ; v2(113.114,168.859) v2@113.241,168.732 ; v2@113.241,168.707 113.538,168.409 C1_seg7.1@114.947,168.409 114.957,168.419 U1_seg7.4@118.547,168.419 ; v2@113.402,82.4 C1_seg3.1@114.947,82.4 114.957,82.41 U1_seg3.4@118.547,82.41 ; C1_seg5.1@114.947,31.8 114.957,31.81 U1_seg5.4@118.547,31.81 ; C1_seg4.1@114.947,57.1 114.957,57.11 U1_seg4.4@118.547,57.11 ; C1_seg9.1@114.947,107.7 114.957,107.71 U1_seg9.4@118.547,107.71 ; C1_seg2.1@114.947,193.709 114.957,193.719 U1_seg2.4@118.547,193.719 ; C1_seg1.1@114.947,219.009 114.957,219.019 U1_seg1.4@118.547,219.019 ; C1_seg6.1@114.947,244.309 114.957,244.319 U1_seg6.4@118.547,244.319
  Bottom Layer w0.635: 86.092,122.842 86.897,123.647 87.663,123.647 ; C6.1@89.401,124.826 92.169,124.826 92.387,125.044 93.5,125.044 ; v2(93.5,127.7) 93.5,125.044 ; v2(94.883,129.983) 95.349,130.449 v2(99.1,134.2) ; v2(96.832,125.044) 93.5,125.044 ; 98.409,86.256 R28.1@98.409,90.545 ; C5.1@101.351,125.043 v2(103.03,125.044) ; v2(105,158) 105,160.1 107.653,162.753 v2(107.653,169.494) v2@107.653,182.778 ; v2(106.756,125.044) 111.044,125.044 115.3,129.3 150.3,129.3 151.4,128.2 v2(155.9,128.2) ; 107.1,86.233 110.291,86.233 ; v2(107.6,232.7) 107.6,240 111.909,244.309 C1_seg6.1@114.947,244.309 ; v2(108.3,107.686) 108.3,98.6 110.291,96.609 110.291,86.233 ; v2(108.4,230.4) 108.4,229.9 108.415,229.885 v1(108.415,193.65) v2(108.415,185.776) ; 108.424,219.009 C1_seg1.1@114.947,219.009 ; v2(111.5,54.886) 111.5,32.686 112.4,31.786 ; v1@111.827,193.709 C1_seg2.1@114.947,193.709 ; 112.414,31.8 C1_seg5.1@114.947,31.8 ; v2@113.114,107.7 C1_seg9.1@114.947,107.7 ; C1_seg5.1@114.947,31.81 C1_seg5.1@114.957,31.81 ; C1_seg4.1@114.947,57.1 v2(111.6,57.1) 110.291,58.409 110.291,86.233
  Bottom Layer w1.27: Z4.8@47.46,120.38 Z4.6@47.46,122.92 ; Z4.4@47.46,125.46 Z4.6@47.46,122.92 ; Z4.5@50,122.92 Z4.6@47.46,122.92 ; C1.2@81.9,109.8 80.25,109.8 ; 86.092,122.842 86.092,122.592 80.25,116.75 80.25,109.8 ; 107.1,86.233 83.767,86.233 80.25,89.75 80.25,106.25 ; Z1.8@184.46,120.38 Z1.6@184.46,122.92 ; Z1.4@184.46,125.46 Z1.6@184.46,122.92 ; Z1.5@187,122.92 Z1.6@184.46,122.92 ; Z4.6@47.46,122.92 44.705,122.92 43.5,121.715 43.5,108.5 45.75,106.25 80.25,106.25 ; 80.25,106.25 80.342,106.342 80.342,109.708 80.25,109.8
  other v2: 110.091,82.341
VCOM: C7.1 R28.2 U3.14 U6.1 U6.8 | length 16.4
  Bottom Layer w0.406: U6.1@88.309,90.545 U6.8@94.024,90.545 R28.2@96.459,90.545 96.397,90.607 C7.1@96.397,96.132 ; U3.14@93.811,96.132 C7.1@96.397,96.132 ; C7.1@96.409,96.145 C7.1@96.397,96.132
VDDLED: C2.2 C3.2 D4.A1 D5.A1 D6.A1 F1.1 SEG-A.A1 SEG-A.A2 SEG-A.A3 SEG-B.A1 SEG-B.A2 SEG-B.A3 SEG-C.A1 SEG-C.A2 SEG-C.A3 SEG-D.A1 SEG-D.A2 SEG-D.A3 SEG-E.A1 SEG-E.A2 SEG-E.A3 SEG-F.A1 SEG-F.A2 SEG-F.A3 SEG-G.A1 SEG-G.A2 SEG-G.A3 | length 1252.4
  Top Layer w1.27: v1(148.656,266.243) v1(148.656,267.538) ; v1(148.656,268.808) v1(148.656,267.538) ; SEG-B.A1@155.721,267.538 v1(148.656,267.538)
  Bottom Layer w1.27: SEG-E.A1@19.721,131.538 19.721,135 ; SEG-F.A1@19.721,267.538 19.721,271.4 ; 28.151,281.127 28.218,281.06 SEG-F.A2@28.218,276.014 ; SEG-E.A2@28.218,140.014 28.218,143.928 ; 32.977,12.573 33.05,12.5 SEG-D.A2@36.75,12.5 ; 34.725,142.93 36.75,144.955 SEG-G.A2@36.75,148.5 36.75,152.541 41.209,157 SEG-G.A3@45.25,157 ; 35.08,279.507 36.75,281.177 SEG-A.A2@36.75,284.5 36.75,289.879 39.871,293 SEG-A.A3@45.25,293 ; SEG-E.A3@36.746,131.505 36.746,135.111 39.645,138.01 41.635,140 SEG-G.A1@45.21,140 ; SEG-F.A3@36.746,267.505 36.746,270.357 40.488,274.099 42.389,276 SEG-A.A1@45.21,276 ; SEG-D.A1@45.21,4 45.21,1.686 45.27,1.626 184.259,1.626 ; 152.9,136 153.1,135.8 153.1,132.4 153.962,131.538 SEG-C.A1@155.721,131.538 ; SEG-B.A1@155.721,267.538 155.721,270.2 ; 161.094,277.139 162.219,276.014 SEG-B.A2@164.218,276.014 ; 163.03,143.211 164.218,142.023 SEG-C.A2@164.218,140.014 ; 172.702,145.821 172.746,145.777 SEG-C.A3@172.746,131.505 ; SEG-B.A3@172.746,267.505 172.746,269.816 175.979,273.049 ; 173.3,275.9 173.4,275.9 C2.2@175,277.5 ; 179.306,269.723 179.357,269.672 179.357,190.856 179.501,191 D6.A1@198.23,191 ; 196.527,29.743 198.23,28.041 D5.A1@198.23,21 ; 198.077,129.184 198.23,129.031 D4.A1@198.23,123 ; F1.1@206.5,129.184 F1.1@206.9,129.184 ; C3.2@211,39.5 211,36.905 211.1,36.805 ; 216.3,129.184 218.066,129.184 219.717,127.533 219.717,102.417 219.5,102.2 219.5,99.4
  Bottom Layer w1.8: 38.17,2.833 39.703,1.3 183.933,1.3 184.259,1.626 185.859,3.226 185.859,4.8
  Bottom Layer w2: 19.721,135 19.721,137.951 25.698,143.928 28.218,143.928 33.727,143.928 34.725,142.93 39.645,138.01 41.655,136 152.9,136 155.819,136 163.03,143.211 165.641,145.821 172.702,145.821 179.306,145.821 ; 19.721,271.4 19.721,275.721 25.127,281.127 28.151,281.127 33.459,281.127 35.08,279.507 40.488,274.099 43.822,270.764 147.995,270.764 148.656,270.104 v1(148.656,267.538) v1(148.656,266.243) ; 38.17,2.833 32.977,8.026 32.977,12.573 32.977,14.577 39.4,21 SEG-D.A3@45.25,21 ; 155.721,270.2 155.721,271.766 161.094,277.139 164.32,280.365 168.663,280.365 175.979,273.049 179.306,269.723 179.306,145.821 ; 185.859,4.8 185.859,26.238 189.364,29.743 196.527,29.743 203.588,36.805 211.1,36.805 216.605,36.805 219.5,39.7 219.5,99.4 ; F1.1@206.5,129.184 198.077,129.184 196.316,129.184 194.5,131 194.5,141.25 189.929,145.821 179.306,145.821 ; F1.1@206.9,129.184 216.3,129.184
VF1: U1_seg1.1 U1_seg1.2 U1_seg1.5 U1_seg1.10 U1_seg1.12 | length 17.8
  Bottom Layer w0.305: U1_seg1.1@118.547,215.209 120.701,215.209 121.089,215.597 121.089,216.486 ; U1_seg1.2@118.547,216.479 121.082,216.479 121.089,216.486 ; U1_seg1.5@118.547,220.289 121.064,220.289 ; U1_seg1.12@123.747,217.749 121.097,217.749 121.089,217.756 ; U1_seg1.10@123.747,220.289 121.064,220.289 ; 121.064,220.289 121.089,220.264 121.089,217.756 ; 121.089,216.486 121.089,217.756
VF2: U1_seg2.1 U1_seg2.2 U1_seg2.5 U1_seg2.10 U1_seg2.12 | length 17.8
  Bottom Layer w0.305: U1_seg2.1@118.547,189.909 120.701,189.909 121.089,190.297 121.089,191.186 ; U1_seg2.2@118.547,191.179 121.082,191.179 121.089,191.186 ; U1_seg2.5@118.547,194.989 121.064,194.989 ; U1_seg2.12@123.747,192.449 121.097,192.449 121.089,192.456 ; U1_seg2.10@123.747,194.989 121.064,194.989 ; 121.064,194.989 121.089,194.964 121.089,192.456 ; 121.089,191.186 121.089,192.456
VF3: U1_seg3.1 U1_seg3.2 U1_seg3.5 U1_seg3.10 U1_seg3.12 | length 17.8
  Bottom Layer w0.305: U1_seg3.1@118.547,78.6 120.701,78.6 121.089,78.988 121.089,79.877 ; U1_seg3.2@118.547,79.87 121.082,79.87 121.089,79.877 ; U1_seg3.5@118.547,83.68 121.064,83.68 ; U1_seg3.12@123.747,81.14 121.097,81.14 121.089,81.147 ; U1_seg3.10@123.747,83.68 121.064,83.68 ; 121.064,83.68 121.089,83.655 121.089,81.147 ; 121.089,79.877 121.089,81.147
VF4: U1_seg4.1 U1_seg4.2 U1_seg4.5 U1_seg4.10 U1_seg4.12 | length 17.8
  Bottom Layer w0.305: U1_seg4.1@118.547,53.3 120.701,53.3 121.089,53.688 121.089,54.577 ; U1_seg4.2@118.547,54.57 121.082,54.57 121.089,54.577 ; U1_seg4.5@118.547,58.38 121.064,58.38 ; U1_seg4.12@123.747,55.84 121.097,55.84 121.089,55.847 ; U1_seg4.10@123.747,58.38 121.064,58.38 ; 121.064,58.38 121.089,58.355 121.089,55.847 ; 121.089,54.577 121.089,55.847
VF5: U1_seg5.1 U1_seg5.2 U1_seg5.5 U1_seg5.10 U1_seg5.12 | length 17.8
  Bottom Layer w0.305: U1_seg5.1@118.547,28 120.701,28 121.089,28.388 121.089,29.277 ; U1_seg5.2@118.547,29.27 121.082,29.27 121.089,29.277 ; U1_seg5.5@118.547,33.08 121.064,33.08 ; U1_seg5.12@123.747,30.54 121.097,30.54 121.089,30.547 ; U1_seg5.10@123.747,33.08 121.064,33.08 ; 121.064,33.08 121.089,33.055 121.089,30.547 ; 121.089,29.277 121.089,30.547
VF6: U1_seg6.1 U1_seg6.2 U1_seg6.5 U1_seg6.10 U1_seg6.12 | length 17.8
  Bottom Layer w0.305: U1_seg6.1@118.547,240.509 120.701,240.509 121.089,240.897 121.089,241.786 ; U1_seg6.2@118.547,241.779 121.082,241.779 121.089,241.786 ; U1_seg6.5@118.547,245.589 121.064,245.589 ; U1_seg6.12@123.747,243.049 121.097,243.049 121.089,243.056 ; U1_seg6.10@123.747,245.589 121.064,245.589 ; 121.064,245.589 121.089,245.564 121.089,243.056 ; 121.089,241.786 121.089,243.056
VF7: U1_seg7.1 U1_seg7.2 U1_seg7.5 U1_seg7.10 U1_seg7.12 | length 17.8
  Bottom Layer w0.305: U1_seg7.1@118.547,164.609 120.701,164.609 121.089,164.997 121.089,165.886 ; U1_seg7.2@118.547,165.879 121.082,165.879 121.089,165.886 ; U1_seg7.5@118.547,169.689 121.064,169.689 ; U1_seg7.12@123.747,167.149 121.097,167.149 121.089,167.156 ; U1_seg7.10@123.747,169.689 121.064,169.689 ; 121.064,169.689 121.089,169.664 121.089,167.156 ; 121.089,165.886 121.089,167.156
VLED: F1.2 Z2.1 Z3.1 Z5.2 Z6.2 | length 564.1
  Top Layer w2.54: Z6.2@49.5,60 Z6.2@54.5,60 75,60 83,52 149,52 150,51 181,51 190,60 Z2.1@205,60 Z2.1@210,60 211,60 212,61 212,108 ; Z5.2@49.5,262 Z5.2@54.5,262 61.4,262 63,263.6 195.6,263.6 197.2,262 Z3.1@205,262 Z3.1@210,262 213,262 214,261 214,250 212,248 212,108 ; 212,120 212,108
  Bottom Layer w1.27: 206.5,134 F1.2@206.5,135.784 ; 206.5,141.1 F1.2@206.5,135.784 ; 214,136 213.784,135.784 F1.2@206.5,135.784
  other v1: 212,135 214,135 212,137 214,137 212,139 214,139 212,141 214,141 212,143 214,143
VR: R24.1 R25.2 R26.1 U1_seg9.3 | length 45.9
  Top Layer w0.406: v2(94.724,106.02) v2(101.226,106.02) ; v1(106.7,106.7) 108.7,106.7 108.9,106.9 v1(111.4,106.9)
  Bottom Layer w0.406: v2(94.724,106.02) 94.749,106.045 R26.1@96.409,106.045 96.409,108.013 97.082,108.687 99.165,108.687 99.597,108.255 99.597,99.365 99.394,99.162 98.376,99.162 R25.2@98.359,99.145 98.359,100.145 98.2,100.305 97.3,100.305 97.295,100.3 96.7,100.3 96.409,100.591 R24.1@96.409,101.445 R24.1@96.422,101.432 ; v2(101.226,106.02) 103.82,106.02 104.5,106.7 v1(106.7,106.7) ; v1(111.4,106.9) 111.437,106.863 112.423,106.863 112.846,106.44 U1_seg9.3@118.547,106.44
VREF: R27.2 U1_seg1.3 U1_seg2.3 U1_seg3.3 U1_seg4.3 U1_seg5.3 U1_seg6.3 U1_seg7.3 U1_seg9.1 U1_seg9.5 U1_seg9.10 U1_seg9.12 | length 371.2
  Top Layer w0.406: v2(78.9,104.9) v2(78.9,107.7) ; v2(108.6,233.7) 109.6,232.7 v2(109.6,231.9) ; v2(109.009,81.14) v2(113.342,81.14) ; v2(109.177,85.2) v2(109.177,87.4) ; v2(109.177,96.323) 109.177,98.677 110.386,99.886 v2(113,99.886) ; v2(109.6,217.8) v2(109.6,220.1) ; v2(110.167,159.309) 109.583,158.725 109.583,155.171 112.326,152.427 ; v2(110.2,133.2) 110.2,134.5 109.659,135.041 109.659,140.828 113.316,144.485 113.316,151.415 112.326,152.405
  Bottom Layer w0.406: v2(78.9,104.9) 78.9,89.23 82.989,85.141 109.117,85.141 v2(109.177,85.2) 109.177,81.308 v2(109.009,81.14) 109.009,80.354 109.177,80.186 109.177,57.909 110.5,56.586 110.5,55.84 ; v2(78.9,107.7) 78.9,108.75 79.158,109.008 79.158,117.202 84.999,123.044 84.999,123.294 85.639,123.934 85.734,123.934 85.782,123.982 85.782,127.282 87.25,128.75 95.45,128.75 100.4,133.7 107.2,133.7 107.7,133.2 v2(110.2,133.2) ; v2(108.6,233.7) 108.6,239.7 111.949,243.049 U1_seg6.3@118.547,243.049 ; v2(109.177,87.4) v2(109.177,96.323) ; v2(109.6,217.8) 109.6,216.6 ; v2(109.6,220.1) v2(109.6,231.9) ; v2(110.167,159.309) 110.802,159.944 110.802,192.405 ; 110.5,53.086 110.5,53.786 ; 110.819,167.149 U1_seg7.3@118.547,167.149 ; 111.122,55.84 112.1,55.84 ; v2(113,99.886) 114.5,99.886 114.917,100.303 R27.2@114.917,103.336 116.302,103.336 116.866,103.9 U1_seg9.1@118.547,103.9 120.752,103.9 121.165,104.313 121.165,106.447 ; v2(113.342,81.14) U1_seg3.3@118.547,81.14 ; U1_seg5.3@118.547,30.54 112.546,30.54 110.5,32.586 110.5,53.786 ; U1_seg4.3@118.547,55.84 112.1,55.84 ; U1_seg9.5@118.547,108.98 121.165,108.98 ; U1_seg2.3@118.547,192.449 110.846,192.449 110.802,192.405 ; U1_seg1.3@118.547,217.749 111.915,217.749 110.766,216.6 109.6,216.6 ; U1_seg9.12@123.747,106.44 121.172,106.44 121.165,106.447 ; U1_seg9.10@123.747,108.98 121.165,108.98 ; 109.6,216.6 109.6,204.502 110.802,203.3 110.802,192.405 ; 110.5,53.786 110.5,55.84 ; 110.5,55.84 112.1,55.84 ; 121.165,106.447 121.165,108.98
VREF-_seg9: R27.1 R29.2 U1_seg9.2 | length 6.1
  Bottom Layer w0.406: R29.2@112.517,105.236 116.56,105.236 116.626,105.17 U1_seg9.2@118.547,105.17 U1_seg9.2@118.541,105.177
pads on no net: D1_seg1.2 D1_seg2.2 D1_seg3.2 D1_seg4.2 D1_seg5.2 D1_seg6.2 D1_seg7.2 D1_seg9.2 D2_seg1.2 D2_seg2.2 D2_seg3.2 D2_seg4.2 D2_seg5.2 D2_seg6.2 D2_seg7.2 D2_seg9.2 D3_seg1.2 D3_seg2.2 D3_seg3.2 D3_seg4.2 D3_seg5.2 D3_seg6.2 D3_seg7.2 D3_seg9.2 D4. D5. D6. F8.0 F9.0 F10.0 H1.0 H2.0 H3.0 H4.0 H5.0 SEG-A.A SEG-A.K SEG-B.A SEG-B.K SEG-C.A SEG-C.K SEG-D.A SEG-D.K SEG-E.A SEG-E.K SEG-F.A SEG-F.K SEG-G.A SEG-G.K U2.10 U4.10 U4.12 U4.13 U4.14 U6.4 U6.5

## Polygon pours and split planes (outlines as drawn)
GND on Top Layer "Top Layer-No Net" (solid, remove dead copper, pour order 1003): 17,0 221,0 221,297 17,297 17,0
VLED on Top Layer "Top Layer-No Net" (solid, remove dead copper, pour order 1000): 212,58 212.857,58.857 216,62 216,69 216,263 215,264 209,264 208,264 208,259 212,259 213,258 213,255 209,251 209,235 209,64 208,63 208,58 212,58
VLED on Top Layer "Top Layer-No Net" (solid, remove dead copper, pour order 1001): 47,265 47,260 195,260 196,259 215,259 215,273 48,273 47,272 47,264
VLED on Top Layer "Top Layer-No Net" (solid, remove dead copper, pour order 1002): 46,64 46,58 58,58 60,56 60,50 60,45 60,44 196,44 198,46 198,58 212,58 213,59 213,63 213,64 46,64
GND on Bottom Layer "GND" (solid, remove dead copper, pour order 1005): 17,297 221.354,297 221,297 221,0 17,0 17,297
VLED on Bottom Layer "Top Layer-No Net" (solid, remove dead copper, pour order 1004): 203,133.3 216,133.3 216,145 205.438,145 203,142.386 203,133.3

## Keep-outs
Keep-Out Layer:
  lines w0.2: 17,0 17,297 221,297 221,0 17,0

## Silkscreen, mask and mechanical layers (free items; w line width, h text height)
Bottom Overlay:
  lines w0.2: 17,0 17,297
  text "VCC" at 76.5,260 h3
  text "VCC" at 198.5,260 h3
  text "GND" at 76.5,255 h3
  text "GND" at 198.5,255 h3
  text "VCC" at 76,58 h3
  text "VCC" at 199,58 h3
  text "GND" at 76,53 h3
  text "GND" at 199,53 h3
Bottom Solder:
  text "VCC" at 68.5,260 h3
  text "VCC" at 190.5,260 h3
  text "GND" at 68.5,255 h3
  text "GND" at 190.5,255 h3
  text "VCC" at 68,58 h3
  text "VCC" at 191,58 h3
  text "GND" at 68,53 h3
  text "GND" at 191,53 h3
MechanicalConstruction:
  lines w0.2: 238,0 261,0 ; 238,0.1 238,297 ; 238,297 238,297 ; 238,297 255,297 ; 255,297 255,297
  lines w0.305: 157,233.5 219,171.5 ; 219,1.5 157,63.5 219,125.5 ; 219,1.5 219,23.5 197,23.5 197,1.5 219,1.5 ; 219,125.5 219,103.5 197,103.5 197,125.5 219,125.5 ; 219,171.5 219,193.5 197,193.5 197,171.5 219,171.5 ; 19,28.5 19,132.5 29.5,143 40,132.5 40,28.5 29.5,18 19,28.5 ; 19,164.5 19,268.5 29.5,279 40,268.5 40,164.5 29.5,154 19,164.5 ; 21.5,271 21.5,271 ; 35,12.5 45.5,23 149.5,23 160,12.5 149.5,2 45.5,2 35,12.5 ; 35,148.5 45.5,159 149.5,159 160,148.5 149.5,138 45.5,138 35,148.5 ; 35,284.5 45.5,274 149.5,274 160,284.5 149.5,295 45.5,295 35,284.5 ; 37.5,26 37.5,26 ; 43,4.5 43,4.5 ; 43,276.5 43,276.5 ; 152,156.5 152,156.5 ; 155,28.5 155,132.5 165.5,143 176,132.5 176,28.5 165.5,18 155,28.5 ; 155,164.5 155,268.5 165.5,279 176,268.5 176,164.5 165.5,154 155,164.5 ; 173.5,26 173.5,26 ; 173.5,162 173.5,162
  lines w1: 8,10 12,10 ; 8,287 12,287 ; 10,8 10,12 ; 10,285 10,289 ; 189,10 193,10 ; 191,8 191,12 ; 209,30 213,30 ; 209,287 213,287 ; 211,28 211,32 ; 211,285 211,289
Outline:
  the board outline again, w0.2

## Dimensions
21,63.6 to 29.5,55.1 on MechanicalConstruction
38.524,97.469 to 38,114.6 on MechanicalConstruction
80.52,21.381 to 63.52,21.381 on MechanicalConstruction
238,0.1 to 221,0 on MechanicalConstruction
199.5,21.381 to 174.016,46.923 on MechanicalConstruction
242,46.6 to 216.525,21.348 on MechanicalConstruction
0,0 to 10,8 on MechanicalConstruction
8,10 to 0,0 on MechanicalConstruction
8,287 to 0,297 on MechanicalConstruction
0,297 to 10,289 on MechanicalConstruction
213,287 to 221,297 on MechanicalConstruction
221,297 to 211,289 on MechanicalConstruction
193,10 to 221,0 on MechanicalConstruction
221,0 to 191,8 on MechanicalConstruction
213,30 to 221,0 on MechanicalConstruction
221,20 to 211,28 on MechanicalConstruction
221,0 to 221,297 on Dimension
0,297 to 221,297 on Dimension

## Text inside footprints (layer, text, board x,y; h text height)
ST1: Top Layer "1" at 3.078,1.681 h1.5 r90; Bottom Layer "2" at 3.079,4.245 h1.5 r90
Z1: Bottom Overlay "10" at 189.735,123.74 h1 r90
Z4: Bottom Overlay "10" at 52.735,123.74 h1 r90